# Altium PCB PCB1.PcbDoc
Units mm, origin at the board's own origin, x right, y up, seen from the top; angles counter-clockwise.
Board outline 114.3 x 55.88 mm, 2 copper layers (Top Layer, Bottom Layer); 37 components, 57 nets, 195 pads, 38 vias.
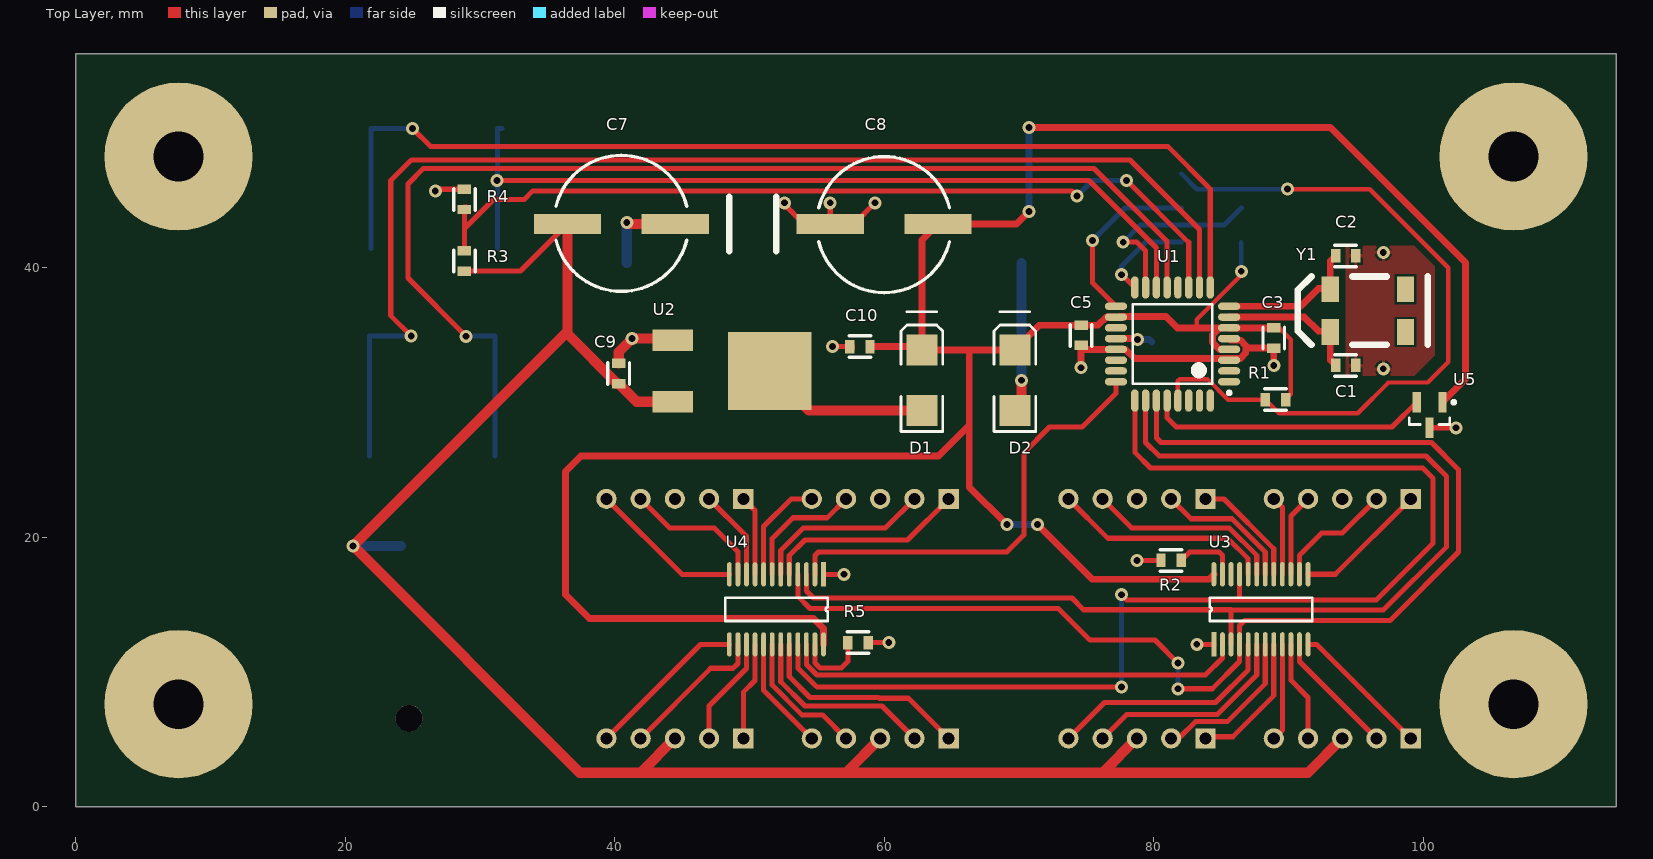
[diagram p0: Top Layer view]
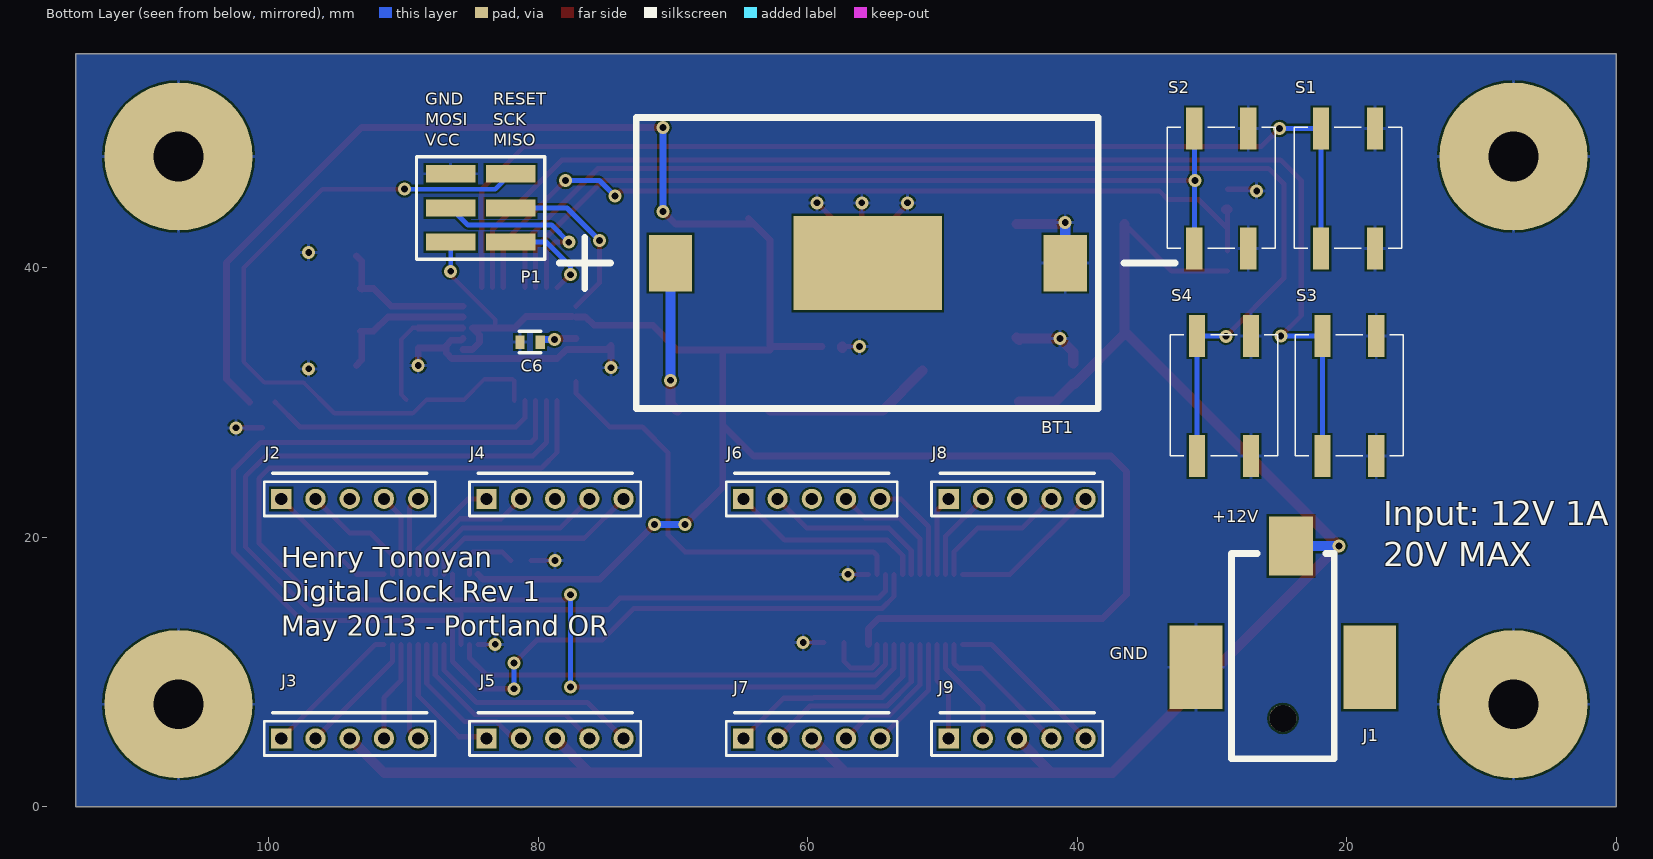
[diagram p1: Bottom Layer view, seen from below]
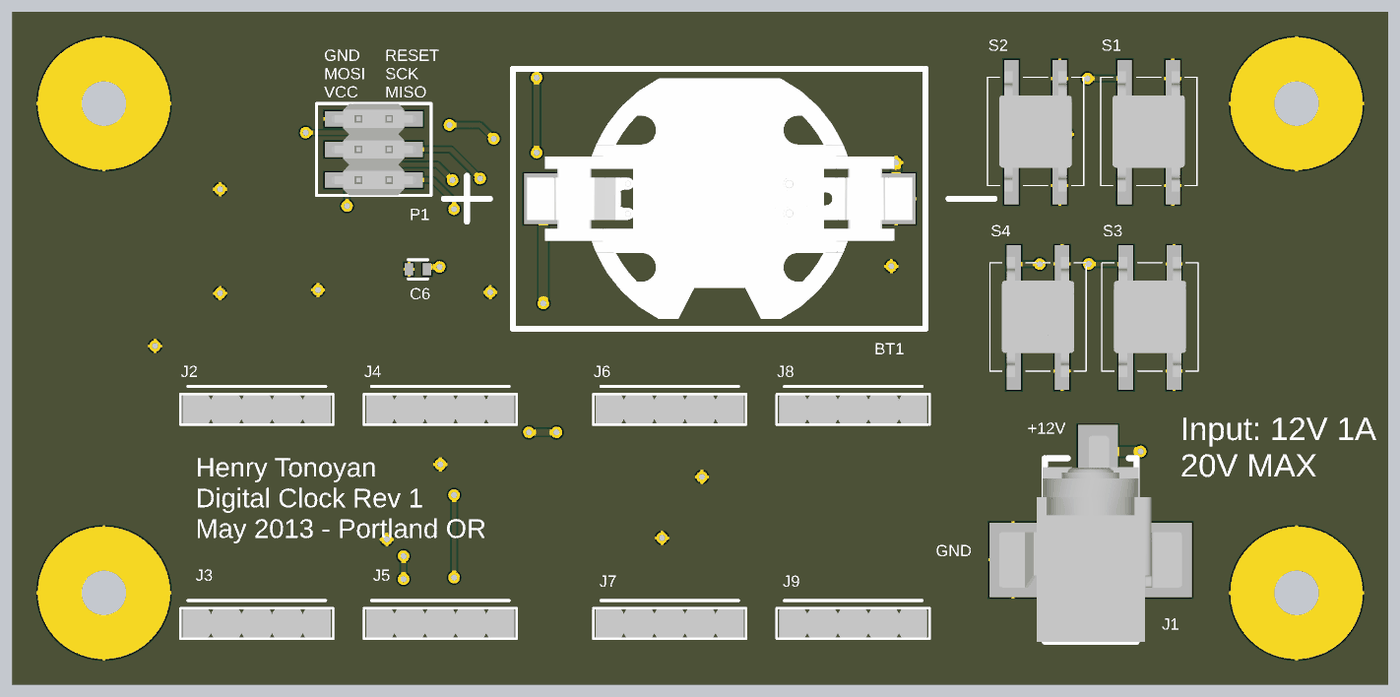
[diagram p2: 3D render of the assembled board from below, using the file's embedded part models]

## Layer stack, top to bottom
Top Solder: solder mask 0.0102, Solder Resist, Dk 3.5
Top Layer: signal copper 0.0356
Dielectric1: dielectric 0.32, FR-4, Dk 4.8
Bottom Layer: signal copper 0.0356
Bottom Solder: solder mask 0.0102, Solder Resist, Dk 3.5

## Board outline
114.3,55.88 114.3,0 0,0 0,55.88

## Design rules (kind name [scope] priority, off if disabled: settings)
Clearance [All] p1: gap=0.152
HoleSize [All] p1: absolutevalues=TRUE maxlimit=5.08 minlimit=0.33 maxpercent=80.000 minpercent=20.000
MinimumAnnularRing [All] p1: minimumring=0.178
MinimumSolderMaskSliver [All] p1: minsoldermaskwidth=0.025
PolygonConnect [All] p1: connectstyle=Relief reliefconductorwidth=0.254 reliefentries=4 polygonreliefangle="90 Angle" airgapwidth=0.254
RoutingCorners [All] p1 off: cornerstyle=45-Degree minsetback=2.54 maxsetback=2.54
RoutingVias [All] p1: holewidth=0.508 width=0.965 viastyle="Through Hole" minholewidth=0.33 minwidth=0.686 maxholewidth=2.54 maxwidth=2.54
SilkToSolderMaskClearance SilkscreenOverComponentPads [IsPad] p1: minsilkscreentomaskgap=0.076 clearancetoexposedcopper=TRUE
SolderMaskExpansion [All] p1: expansion=0.102
Width [All] p1: maxlimit=5.08 minlimit=0.254 preferedwidth=0.508 minimp=50.000000 maximp=50.000000 favimp=50.000000
26 further rules are at their usual default settings.

## Components (designator, comment, footprint, x,y, rotation, side; value= is the part's Value field where it differs from the comment)
BT1 "HOLDER COIN CELL 2032 SMD" BU2032SM-HD-G 70.18,40.36 r180 bottom
C1 "CAP CER 10PF 50V 5% C0G 0603" 0603 94.234,32.766 r180 top
C2 "CAP CER 10PF 50V 5% C0G 0603" 0603 94.234,40.894 r180 top
C3 "CAP CER .10UF 25V X7R 10% 0603" 0603 88.896,34.796 r270 top
C5 "CAP CER .10UF 25V X7R 10% 0603" 0603 74.596,34.996 r270 top
C6 "CAP CER .10UF 25V X7R 10% 0603" 0603 80.596,34.496 r0 bottom
C7 "CAP ALUM 220UF 25V 20% SMD" "CAP AVE227M25F24T-F" 36.48,43.26 r0 top
C8 "CAP ALUM 220UF 25V 20% SMD" "CAP AVE227M25F24T-F" 63.98,43.26 r180 top
C9 "CAP CER .10UF 25V X7R 10% 0603" 0603 40.28,32.16 r270 top
C10 "CAP CER .10UF 25V X7R 10% 0603" 0603 58.18,34.16 r0 top
D1 "DIODE_SCHOTTKY_30V_2A_SMB" DSO-C2/X2.3 62.78,31.66 r90 top
D2 "DIODE_SCHOTTKY_30V_2A_SMB" DSO-C2/X2.3 69.68,31.66 r90 top
J1 "CONN_PWR2.0_SMT" CONN_PWR2.0_SMT 24.724,3.566 r90 bottom
J2 "CONN_HEADER_VERT_5POS_.100_TIN" CONN_HDR1X5 99.06,22.86 r180 bottom
J3 "CONN_HEADER_VERT_5POS_.100_TIN" CONN_HDR1X5 99.06,5.08 r180 bottom
J4 "CONN_HEADER_VERT_5POS_.100_TIN" CONN_HDR1X5 83.82,22.86 r180 bottom
J5 "CONN_HEADER_VERT_5POS_.100_TIN" CONN_HDR1X5 83.82,5.08 r180 bottom
J6 "CONN_HEADER_VERT_5POS_.100_TIN" CONN_HDR1X5 64.77,22.86 r180 bottom
J7 "CONN_HEADER_VERT_5POS_.100_TIN" CONN_HDR1X5 64.77,5.08 r180 bottom
J8 "CONN_HEADER_VERT_5POS_.100_TIN" CONN_HDR1X5 49.53,22.86 r180 bottom
J9 "CONN_HEADER_VERT_5POS_.100_TIN" CONN_HDR1X5 49.53,5.08 r180 bottom
P1 "Header, 3-Pin, Dual row" CONN_HDR_SMT_6_2R 82.042,41.91 r0 bottom
R1 "RES_4.70K_OHM_1/10W_1%_0603_SMD" 0603 89.027,30.226 r0 top
R2 "RES_1.60K_OHM_1/10W_1%_0603_SMD" 0603 81.28,18.288 r180 top
R3 "RES_698K_OHM_1/10W_1%_0603_SMD" 0603 28.829,40.513 r90 top
R4 "RES_107K_OHM_1/10W_1%_0603_SMD" 0603 28.829,45.085 r270 top
R5 "RES_1.60K_OHM_1/10W_1%_0603_SMD" 0603 58.039,12.192 r0 top
S1 "SW_1571634-2" 1571634-2 21.898,41.444 r90 bottom
S2 "SW_1571634-2" 1571634-2 31.298,41.444 r90 bottom
S3 "SW_1571634-2" 1571634-2 21.798,26.044 r90 bottom
S4 "SW_1571634-2" 1571634-2 31.098,26.044 r90 bottom
U1 "IC_AVR_MCU_4K_10MHZ_1.8V_32TQFP" 32A_N 81.385,34.353 r180 top
U2 "IC_REG_LDO_3.3V_DPAK" DPAK 48.38,32.36 r180 top
U3 "IC_LED_DRIVER_LINEAR_24-QSOP" SOP24 84.455,12.065 r90 top
U4 "IC_LED_DRIVER_LINEAR_24-QSOP" SOP24 55.48,17.26 r270 top
U5 "Temperature Sensor" SOT23-3N 100.457,29.083 r270 top
Y1 "CRYSTAL_32.768_KHZ_6.0 PF_SMD" ABS25 93.726,36.83 r0 top

## Footprints (in the part's own frame and the unit in brackets; to place one, negate y for a bottom-side part, rotate by r counter-clockwise, add the part's x,y. Pads: shape width x height; smd on the part's side, far side on the other; paste and mask are expansions set on the pad)
32A_N [mm] "Thin QFP, 32-Leads, Body 7x7mm, Pitch 0.8mm, IPC Medium Density"
  oval 1.65x0.55 smd: 1(-4.2,2.8) 2(-4.2,2) 3(-4.2,1.2) 4(-4.2,0.4) 5(-4.2,-0.4) 6(-4.2,-1.2) 7(-4.2,-2) 8(-4.2,-2.8) 17(4.2,-2.8) 18(4.2,-2) 19(4.2,-1.2) 20(4.2,-0.4) 21(4.2,0.4) 22(4.2,1.2) 23(4.2,2) 24(4.2,2.8)
  oval 0.55x1.65 smd: 9(-2.8,-4.2) 10(-2,-4.2) 11(-1.2,-4.2) 12(-0.4,-4.2) 13(0.4,-4.2) 14(1.2,-4.2) 15(2,-4.2) 16(2.8,-4.2) 25(2.8,4.2) 26(2,4.2) 27(1.2,4.2) 28(0.4,4.2) 29(-0.4,4.2) 30(-1.2,4.2) 31(-2,4.2) 32(-2.8,4.2)
  silkscreen extent -4.33,-2.95 2.95,3.75, body extent -3.5,-3.5 3.5,3.5, height 1.2
0603 [mm]
  rect 0.7x1 smd: 1(-0.75,0) 2(0.75,0)
  silkscreen extent -0.8,-0.8 0.8,0.8, body extent -0.8,-0.8 0.8,0.8, height 0.45
1571634-2 [mm] "Switch"
  rect 3.1x1.2 smd: 1(0,0) 1(8.9,0) 2(0,-4) 2(8.9,-4)
  silkscreen extent 0,-6 9,2, body extent -0.5,-5 9.5,1, height 5.1
ABS25 [mil]
  rect 50x75 smd: 1(-25,-62.5) 2(195,-62.5) 3(195,62.5) 4(-25,62.5)
  silkscreen extent -120,-100 260,100
BU2032SM-HD-G [mm] "HOLDER COIN CELL 2032 SMD"
  rect 3.2x4.2 smd: 1(0,0) 2(29.3,0)
  rect 11x7 smd: ""(14.65,0)
  silkscreen extent -8.25,-10.8 37.46,10.79, body extent -1.35,-10 30.65,10, height 5.3
"CAP AVE227M25F24T-F" [mm]
  rect 5x1.5 smd: 1(0,0) 2(8,0)
  silkscreen extent -0.85,-5 12,5.1, body extent -0.22,-4.24 8.25,4.24, height 10.8
CONN_HDR1X5 [mm] "Connector; Header; 5 Position"
  rect 1.5x1.5 hole 0.9: 1(0,0)
  round 1.5 hole 0.9: 2(2.54,0) 3(5.08,0) 4(7.62,0) 5(10.16,0)
  silkscreen extent -1.27,-1.27 11.43,1.91, body extent -1.07,-1.17 11.23,1.17, height 8.14
CONN_HDR_SMT_6_2R [mil]
  rect 145x50 smd: 1(0,0) 2(175,0) 3(0,-100) 4(175,-100) 5(0,-200) 6(175,-200)
  silkscreen extent -100,-250 275,50, body extent -50,-250 225,50, height 379
CONN_PWR2.0_SMT [mm]
  rect 4.4x3.3 smd: 1(15.8,-0.6)
  rect 6.2x3.9 smd: 2(6.8,6.45) 3(6.8,-6.45)
  round 2 hole 2: ""(3,0)
  silkscreen extent 0,-3.81 15.24,3.81, body extent 0,-7.6 17.1,7.6, height 11.05
DPAK [mm]
  rect 3x1.6 smd: 1(4.08,-2.285) 3(4.08,2.285)
  rect 6.2x5.8 smd: 2(-3.1,0)
DSO-C2/X2.3 [mm] "DO-214-AA/SMB; 2 C-Bend Leads; Body 5.3 x 3.6 mm, inc. leads (LxW)"
  rect 2.3x2.3 smd: 1(-2.25,0) 2(2.25,0)
  silkscreen extent -3.8,-1.55 5.08,1.55
SOP24 [mm]
  rect 1.8x0.35 smd: 1(0,0)
  oval 1.8x0.35 smd: 2(0,-0.635) 3(0,-1.27) 4(0,-1.905) 5(0,-2.54) 6(0,-3.175) 7(0,-3.81) 8(0,-4.445) 9(0,-5.08) 10(0,-5.715) 11(0,-6.35) 12(0,-6.985) 13(5.2,-6.985) 14(5.2,-6.35) 15(5.2,-5.715) 16(5.2,-5.08) 17(5.2,-4.445) 18(5.2,-3.81) 19(5.2,-3.175) 20(5.2,-2.54) 21(5.2,-1.905) 22(5.2,-1.27) 23(5.2,-0.635) 24(5.2,0)
  silkscreen extent 1.73,-7.3 3.47,0.32
SOT23-3N [mm] "SOT23, 3-Leads, Body 2.9x1.3mm, Pitch 0.95mm, Lead Span 2.5mm, IPC Medium Density"
  rect 1.5x0.6 smd: 1(-0.95,0.95) 2(-0.95,-0.95) 3(0.95,0)
  silkscreen extent -1.07,-1.5 0.7,1.93, body extent -0.7,-1.5 0.7,1.5, height 1.1

## Part data
BT1: library part BU2032SM-HD-G
C1 C2: library part CAP_CER_10PF_50V_5%_C0G_0603
C3 C5 C6 C9 C10: library part CAP_CER_.10UF_25V_X7R_10%_0603_1
C7 C8: library part CAP_ALUM_220UF_25V_20%_SMD
D1 D2: "DIODE SCHOTTKY 30V 2A SMB"
J1: "CONN PWR JACK 2.0X6.3MM SMT"
J2 J3 J4 J5 J6 J7 J8 J9: "CONN HEADER VERT 5POS .100 TIN"
P1: library part CONN_Header_0.100_6pos
R1: "RES 4.70K OHM 1/10W 1% 0603 SMD"
R2 R5: "RES 1.60K OHM 1/10W 1% 0603 SMD"
R3: "RES 698K OHM 1/10W 1% 0603 SMD"
R4: "RES 107K OHM 1/10W 1% 0603 SMD"
S1 S2 S3 S4: "Single-Pole, Single-Throw Switch"
U1: "IC AVR MCU 4K 10MHZ 1.8V 32TQFP"
U2: "IC REG LDO 3.3V DPAK"
U3 U4: "IC LED DRIVER LINEAR 24-QSOP"
U5: library part IC_TEMP-VOLT_CONV_PREC_SOT-23B, "IC TEMP-VOLT CONV PREC SOT-23B"
Y1: "CRYSTAL 32.768 KHZ 6.0 PF SMD"

## Free pads (board coordinates)
  round 11 hole 3.7: 0(7.62,7.62) 0(7.62,48.26) 0(106.68,7.62) 0(106.68,48.26)

## Via types
v1: diameter 0.965, hole 0.508, Top Layer to Bottom Layer, 38 vias

## Nets (pads, with @x,y where several pads share a name; then routed paths per layer and width w, separated by ;. In a path a pad name is that pad's centre, name@x,y a point inside that pad or via, vN(x,y) a via of type N, cw(c..) or ccw(c..) an arc to the next point about the centre after c; other vN are vias at no path point)
+12: C7.1 C9.2 J1.1 J3.3 J5.3 J7.3 J9.3 R3.1 U2.3 | length 145.2
  Top Layer w0.381: R3.1 32.983,39.763 C7.1
  Top Layer w0.762: 36.314,35.106 v1(20.574,19.366) 37.4,2.54 41.91,2.54 ; C7.1 36.48,35.106 40.176,31.41 C9.2 41.615,30.075 U2.3 ; J9.3 41.91,2.54 ; J7.3 57.15,2.54 ; J5.3 76.2,2.54 ; J3.3 91.44,2.54 76.2,2.54 ; 41.91,2.54 57.15,2.54 ; 57.15,2.54 76.2,2.54
  Bottom Layer w0.762: v1(20.574,19.366) J1.1
BUTTON_1: S1.1 U1.9 | length 80.4
  Top Layer w0.381: v1(24.982,50.344) 26.304,49.022 81.026,49.022 84.185,45.863 U1.9
  Bottom Layer w0.381: S1.1@21.898,41.444 21.898,50.344 v1(24.982,50.344)
BUTTON_2: S2.1 U1.14 | length 63.2
  Top Layer w0.381: v1(31.242,46.482) 75.184,46.482 80.185,41.481 U1.14
  Bottom Layer w0.381: S2.1@31.298,41.444 31.298,50.344 S2.1@31.623,50.344
BUTTON_3: S3.1 U1.10 | length 91.2
  Top Layer w0.381: v1(24.882,34.944) 23.368,36.458 23.368,46.482 24.892,48.006 78.232,48.006 83.385,42.853 U1.10
  Bottom Layer w0.381: S3.1@21.798,26.044 21.798,34.944 v1(24.882,34.944)
BUTTON_4: S4.1 U1.13 | length 86.6
  Top Layer w0.381: v1(28.956,34.925) 24.638,39.243 24.638,46.228 25.781,47.371 75.565,47.371 80.985,41.951 U1.13
  Bottom Layer w0.381: v1@28.975,34.944 31.098,34.944 S4.1@31.098,26.044
DISP_CLK: U1.26 U3.3 U4.3 | length 85.5
  Top Layer w0.381: U4.3 54.21,16.021 54.737,15.494 73.914,15.494 74.778,14.63 85.7,14.63 85.725,14.605 ; U1.26 79.385,27.041 80.391,26.035 100.203,26.035 101.727,24.511 101.727,19.304 97.028,14.605 85.725,14.605 ; U3.3 85.725,14.605
DISP_HH_DATA: U3.2 U4.22 | length 34.2
  Top Layer w0.381: U4.22 54.21,10.568 54.999,9.779 83.82,9.779 85.09,11.049 U3.2
DISP_LATCH: U1.27 U3.4 U4.4 | length 92.8
  Top Layer w0.381: U4.4 53.575,15.64 54.483,14.732 72.898,14.732 75.248,12.383 80.073,12.383 v1(81.788,10.668) ; U1.27 80.185,27.384 80.529,27.04 100.595,27.04 102.616,25.019 102.616,18.923 97.536,13.843 86.741,13.843 86.36,13.462 U3.4 86.36,10.795 84.328,8.763 v1(81.788,8.763)
  Bottom Layer w0.381: v1@81.788,8.636 v1(81.788,8.763) v1(81.788,10.668)
DISP_MM_DATA: U1.24 U4.2 | length 33.1
  Top Layer w0.381: U4.2 54.845,18.65 55.118,18.923 69.088,18.923 70.358,20.193 70.358,26.289 72.263,28.194 74.676,28.194 77.185,30.703 U1.24
DISP_O\E\: U1.25 U3.21 U4.21 | length 91.5
  Top Layer w0.381: U4.21 53.575,10.306 54.864,9.017 ; 54.991,8.89 v1(77.597,8.89) ; v1(77.597,15.748) 77.978,15.367 86.36,15.367 ; U1.25 78.585,26.317 79.756,25.146 99.949,25.146 100.711,24.384 100.711,19.558 96.52,15.367 86.36,15.367 ; U3.21 86.36,15.367
  Bottom Layer w0.381: v1(77.597,8.89) v1(77.597,15.748)
GND: BT1.2 C1.1 C2.1 C3.2 C5.2 C6.2 C7.2 C8.2 C9.1 C10.1 J1.2 P1.6 pad.0 R2.2 R4.1 R5.2 S1.2 S2.2 S3.2 S4.2 U1.3 U1.5 U1.21 U2.1 U3.1 U4.1 U5.3 | length 52.7
  Top Layer w0.381: v1(26.67,45.72) 26.785,45.835 R4.1 ; v1@52.578,44.704 54.022,43.26 C8.2 ; U4.1 v1(57.011,17.26) ; v1@55.98,44.731 C8.2 ; v1(56.137,34.16) C10.1 ; R5.2 v1(60.325,12.192) ; v1(59.309,44.831) 57.738,43.26 C8.2 ; v1(78.74,18.288) R2.2 ; v1(83.185,12.065) U3.1 ; U5.3 v1(102.428,28.133)
  Top Layer w0.508: v1(74.596,32.592) C5.2 74.889,33.953 U1.21 77.899,33.953 78.58,33.272 86.417,33.272 86.816,33.671 86.816,34.235 86.417,34.634 85.704,34.634 U1.5 ; 87.006,34.046 C3.2 v1(88.896,32.77)
  Top Layer w0.762: C9.1 40.28,33.76 v1(41.28,34.76) U2.1@44.185,34.76 ; v1@40.98,43.26 C7.2 ; U2.1 U2.1@44.48,34.825 ; C10.1@57.43,34.056 C10.1
  Bottom Layer w0.762: BT1.2 v1(40.88,43.36)
  other v1: 97.028,32.512 97.028,41.148 52.578,44.831 55.98,44.831
HOUR1A: J2.2 U3.14 | length 8.9
  Top Layer w0.381: U3.14 90.805,18.669 92.456,20.32 93.98,20.32 J2.2
HOUR1B: J2.1 U3.13 | length 9.9
  Top Layer w0.381: U3.13 93.465,17.265 J2.1
HOUR1C: J3.2 U3.11 | length 9.4
  Top Layer w0.381: U3.11 90.805,10.795 J3.2
HOUR1D: J3.4 U3.10 | length 7.5
  Top Layer w0.381: U3.10 90.17,9.398 91.44,8.128 J3.4
HOUR1E: J3.5 U3.9 | length 7.2
  Top Layer w0.381: J3.5 89.535,5.715 U3.9
HOUR1F: J2.4 U3.15 | length 6.1
  Top Layer w0.381: U3.15 90.17,21.59 J2.4
HOUR1G: J2.5 U3.16 | length 5.9
  Top Layer w0.381: J2.5 89.535,22.225 U3.16
HOUR1P: J3.1 U3.12 | length 10.5
  Top Layer w0.381: U3.12 92.075,12.065 J3.1
HOUR2A: J4.2 U3.18 | length 10.3
  Top Layer w0.381: J4.2 82.753,21.387 85.801,21.387 88.265,18.923 U3.18
HOUR2B: J4.1 U3.17 | length 8.5
  Top Layer w0.381: J4.1 85.194,22.86 88.9,19.154 U3.17
HOUR2C: J5.2 U3.7 | length 11
  Top Layer w0.381: J5.2@81.835,5.08 83.08,6.325 85.446,6.325 88.265,9.144 U3.7
HOUR2D: J5.4 U3.6 | length 15.7
  Top Layer w0.381: J5.4 77.978,6.858 84.709,6.858 87.63,9.779 U3.6
HOUR2E: J5.5 U3.5 | length 17.3
  Top Layer w0.381: J5.5 76.327,7.747 84.582,7.747 86.995,10.16 U3.5
HOUR2F: J4.4 U3.19 | length 14.6
  Top Layer w0.381: J4.4 78.359,20.701 85.598,20.701 87.63,18.669 U3.19
HOUR2G: J4.5 U3.20 | length 16.3
  Top Layer w0.381: J4.5 76.581,19.939 85.471,19.939 86.995,18.415 U3.20
HOUR2P: J5.1 U3.8 | length 10.2
  Top Layer w0.381: J5.1@83.82,5.207 85.852,5.207 88.9,8.255 U3.8
MIN1A: J6.2 U4.6 | length 13.3
  Top Layer w0.381: U4.6 52.305,19.031 53.975,20.701 60.071,20.701 J6.2
MIN1B: J6.1 U4.5 | length 15
  Top Layer w0.381: U4.5 52.94,18.65 54.102,19.812 61.722,19.812 J6.1
MIN1C: J7.2 U4.19 | length 14.4
  Top Layer w0.381: U4.19 52.305,9.29 54.102,7.493 59.817,7.493 J7.2
MIN1D: J7.4 U4.18 | length 10.1
  Top Layer w0.381: U4.18 51.67,9.036 53.873,6.833 55.397,6.833 J7.4
MIN1E: J7.5 U4.17 | length 8.5
  Top Layer w0.381: U4.17 51.035,8.655 J7.5
MIN1F: J6.4 U4.7 | length 9.4
  Top Layer w0.381: U4.7 51.67,19.92 53.213,21.463 55.753,21.463 J6.4
MIN1G: J6.5 U4.8 | length 8
  Top Layer w0.381: U4.8 51.035,20.809 53.086,22.86 J6.5
MIN1P: J7.1 U4.20 | length 16.1
  Top Layer w0.381: U4.20 52.94,9.671 54.483,8.128 59.563,8.128 59.627,8.064 61.785,8.064 J7.1
MIN2A: J8.2 U4.10 | length 6.7
  Top Layer w0.381: J8.2 49.765,20.085 U4.10
MIN2B: J8.1 U4.9 | length 6
  Top Layer w0.381: J8.1 50.4,21.99 U4.9
MIN2C: J9.2 U4.15 | length 8.1
  Top Layer w0.381: J9.2 46.99,7.493 49.765,10.268 U4.15
MIN2D: J9.4 U4.14 | length 10.9
  Top Layer w0.381: J9.4 47.117,10.287 48.768,10.287 49.13,10.649 U4.14
MIN2E: J9.5 U4.13 | length 12
  Top Layer w0.381: J9.5 46.35,12.06 U4.13
MIN2F: J8.4 U4.11 | length 10.5
  Top Layer w0.381: J8.4 44.069,20.701 47.371,20.701 49.13,18.942 U4.11
MIN2G: J8.5 U4.12 | length 11.4
  Top Layer w0.381: J8.5 44.97,17.26 U4.12
MIN2P: J9.1 U4.16 | length 7.3
  Top Layer w0.381: J9.1 49.53,8.509 50.4,9.379 U4.16
MISO: P1.1 U1.16 | length 7.2
  Top Layer w0.381: v1(77.597,39.497) 77.641,39.497 U1.16
  Bottom Layer w0.381: v1(77.597,39.497) 77.597,40.132 79.375,41.91 P1.1
MOSI: P1.4 U1.15 | length 14.5
  Top Layer w0.381: v1(77.724,41.91) 78.75,41.91 79.385,41.275 U1.15
  Bottom Layer w0.381: v1(77.724,41.91) 78.994,43.18 85.217,43.18 P1.4
NetBT1_1: BT1.1 D2.1 | length 11.2
  Top Layer w0.762: D2.1 70.18,29.91 v1(70.18,31.66)
  Bottom Layer w0.762: v1(70.18,31.66) BT1.1
NetC1_2: C1.2 U1.7 Y1.1 | length 10.7
  Top Layer w0.508: U1.7 91.155,36.353 92.202,35.306 Y1.1@93.196,35.306 ; Y1.1 93.091,33.159 C1.2
NetC2_2: C2.2 U1.8 Y1.4 | length 10.8
  Top Layer w0.508: U1.8 90.874,37.153 92.202,38.481 Y1.4@93.196,38.481 ; Y1.4 93.091,40.501 C2.2
NetC6_1: C6.1 U1.20 | length 2.7
  Top Layer w0.508: U1.20 v1@78.739,34.753
  Bottom Layer w0.508: v1(78.796,34.696) 79.646,34.696 C6.1
NetD1_1: D1.1 U2.2 | length 12.5
  Top Layer w0.762: U2.2 54.43,29.41 D1.1
NetR2_1: R2.1 U3.23 | length 4.8
  Top Layer w0.381: R2.1 82.665,18.923 84.836,18.923 85.09,18.669 U3.23
NetR5_1: R5.1 U4.23 | length 5.6
  Top Layer w0.381: U4.23 54.845,10.687 55.22,10.312 56.794,10.312 57.289,10.807 R5.1
PWR_SENSE: R3.2 R4.2 U1.11 | length 63.9
  Top Layer w0.381: R3.2 28.829,42.926 ; R4.2 28.829,42.926 ; v1(74.295,45.339) 73.914,45.72 33.909,45.72 33.274,45.085 30.988,45.085 28.829,42.926 ; v1(77.978,46.482) 82.55,41.91 ; U1.11 82.585,41.91
  Top Layer w0.762: R4.2 R4.2@28.933,44.335
  Bottom Layer w0.381: v1(74.295,45.339) 75.438,46.482 v1(77.978,46.482)
RESET: P1.5 R1.1 U1.29 | length 53.8
  Top Layer w0.33: U1.29 81.785,31.62 81.915,31.75 83.976,31.75 85.5,30.226 R1.1 89.293,29.21 95.123,29.21 97.409,31.496 100.33,31.496 101.854,33.02 101.854,40.005 96.012,45.847 v1(89.916,45.847)
  Bottom Layer w0.33: P1.5 83.185,45.847 v1@89.789,45.847
SCK: P1.3 U1.17 | length 13.2
  Top Layer w0.381: v1(75.438,42.037) 75.438,38.9 U1.17
  Bottom Layer w0.381: v1(75.438,42.037) 77.851,44.45 P1.3
TEMP: U1.28 U5.2 | length 20.8
  Top Layer w0.381: U1.28 80.985,28.87 81.661,28.194 97.668,28.194 U5.2
VCC: C3.1 C5.1 C8.1 C10.2 D1.2 D2.2 P1.2 R1.2 U1.4 U1.6 U1.18 U3.24 U4.24 U5.1 | length 211.1
  Top Layer w0.33: 83.185,35.553 83.185,36.165 v1@86.487,39.467 ; C3.1 89.295,35.546 90.17,34.671 90.17,30.619 R1.2
  Top Layer w0.508: U4.24 55.48,13.227 54.737,13.97 38.1,13.97 36.322,15.748 36.322,24.892 37.465,26.035 64.008,26.035 66.294,28.321 ; C10.2 D1.2@62.53,34.16 ; C8.1@64.38,43.66 C8.1 ; v1(69.088,20.955) 66.294,23.749 66.294,28.321 ; v1(70.739,44.196) 69.803,43.26 C8.1 ; v1(70.739,50.419) 93.091,50.419 103.124,40.386 103.124,31.75 U5.1 ; v1(71.374,20.955) 75.438,16.891 84.081,16.891 U3.24 ; U1.18 76.471,36.353 75.864,35.746 C5.1 71.516,35.746 D2.2 66.294,33.91 ; U1.18@77.465,36.396 80.896,36.396 81.739,35.553 83.185,35.553 84.871,35.553 84.354,35.035 84.354,34.471 84.871,33.953 U1.4 ; U1.6@85.592,35.546 C3.1 ; C8.1 62.78,42.06 D1.2 66.294,33.91 ; 66.294,28.321 66.294,33.91
  Bottom Layer w0.33: v1(86.487,39.751) P1.2
  Bottom Layer w0.508: v1(69.088,20.955) v1(71.374,20.955) ; v1(70.739,44.196) v1(70.739,50.419)
pads on no net: BT1. J1. J1.3 J2.3 J4.3 J6.3 J8.3 U1.1 U1.2 U1.12 U1.19 U1.22 U1.23 U1.30 U1.31 U1.32 U3.22 Y1.2 Y1.3

## Polygon pours and split planes (outlines as drawn)
GND on Top Layer "Top Layer-No Net" (solid, pour order 7): 94.234,32.004 94.234,41.656 99.314,41.656 100.838,40.132 100.838,33.528 99.314,32.004 94.234,32.004
GND on Bottom Layer "Top Layer-No Net" (solid, pour order 9): 0,0 114.3,0 114.3,55.88 0,55.88 0,0

## Silkscreen, mask and mechanical layers (free items; w line width, h text height)
Bottom Overlay:
  text "RESET" at 83.312,51.816 h1.52
  text "GND" at 88.392,51.816 h1.52
  text "SCK" at 83.312,50.292 h1.52
  text "MOSI" at 88.392,50.292 h1.52
  text "MISO" at 83.312,48.768 h1.52
  text "VCC" at 88.392,48.768 h1.52
  text "+12V" at 29.972,20.828 h1.52
  text "Input: 12V 1A" at 17.272,20.32 h3.05
  text "20V MAX" at 17.272,17.272 h3.05
  text "Henry Tonoyan" at 99.06,17.272 h2.54
  text "Digital Clock Rev 1" at 99.06,14.732 h2.54
  text "May 2013 - Portland OR" at 99.06,12.192 h2.54
  text "GND" at 37.592,10.668 h1.52
Board Outline:
  the board outline again, w0.1